# Altium PCB Layout_Dendrometro.PcbDoc (part 1 of 2)
Units mm, origin at the board's own origin, x right, y up, seen from the top; angles counter-clockwise.
Board outline 70 x 70 mm, 4 copper layers (L1 - TOP (Sig), L2 (GND), L3 (GND), L4 - BOT (Sig)), stack 0.603 mm thick; 138 components, 78 nets, 374 pads, 106 vias.
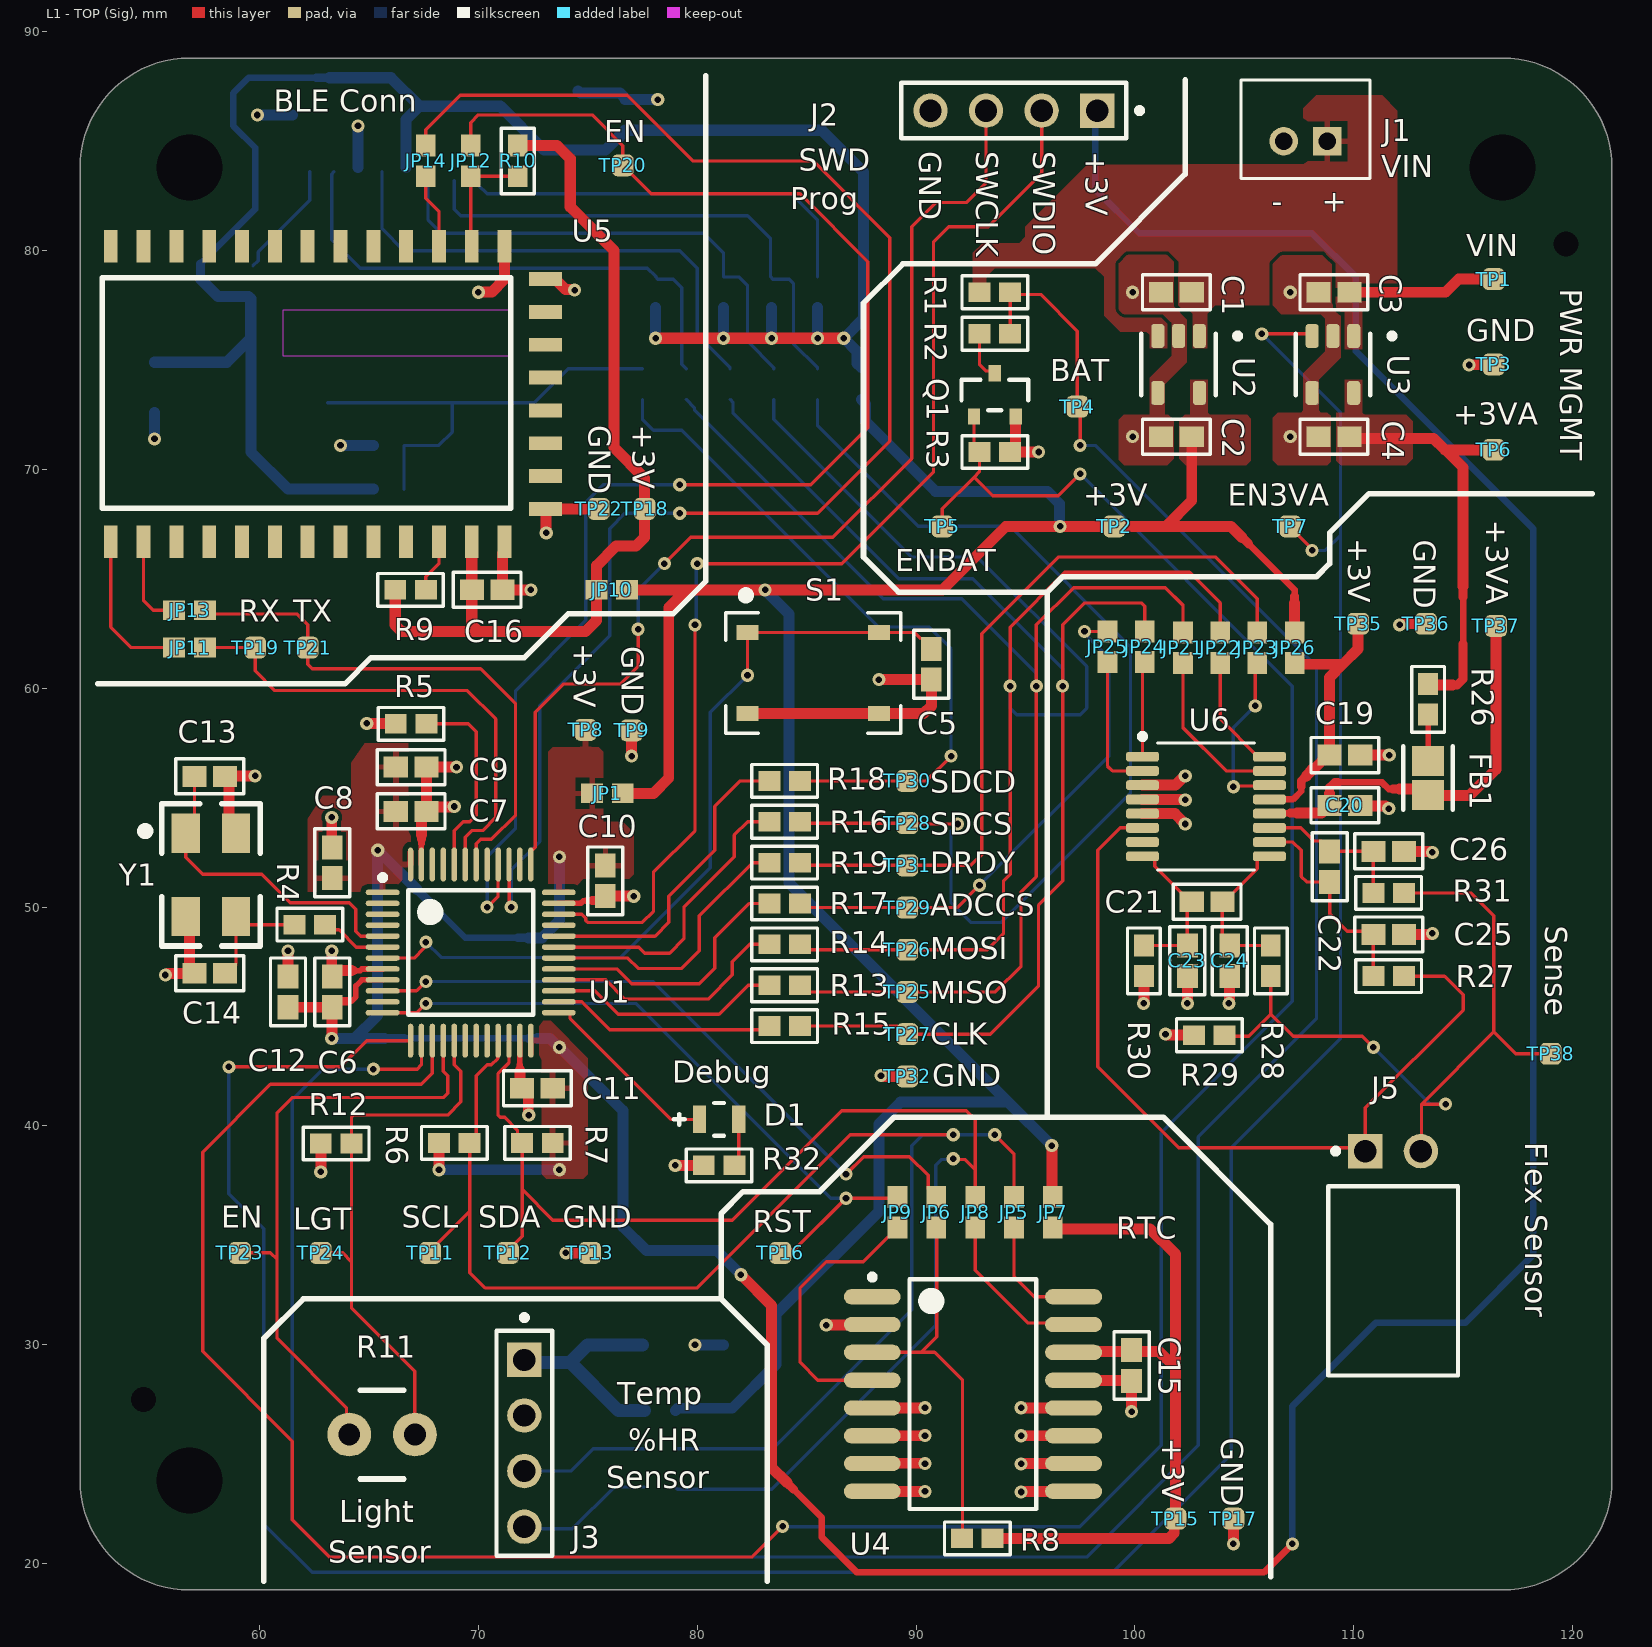
[diagram p0: L1 - TOP (Sig) view]
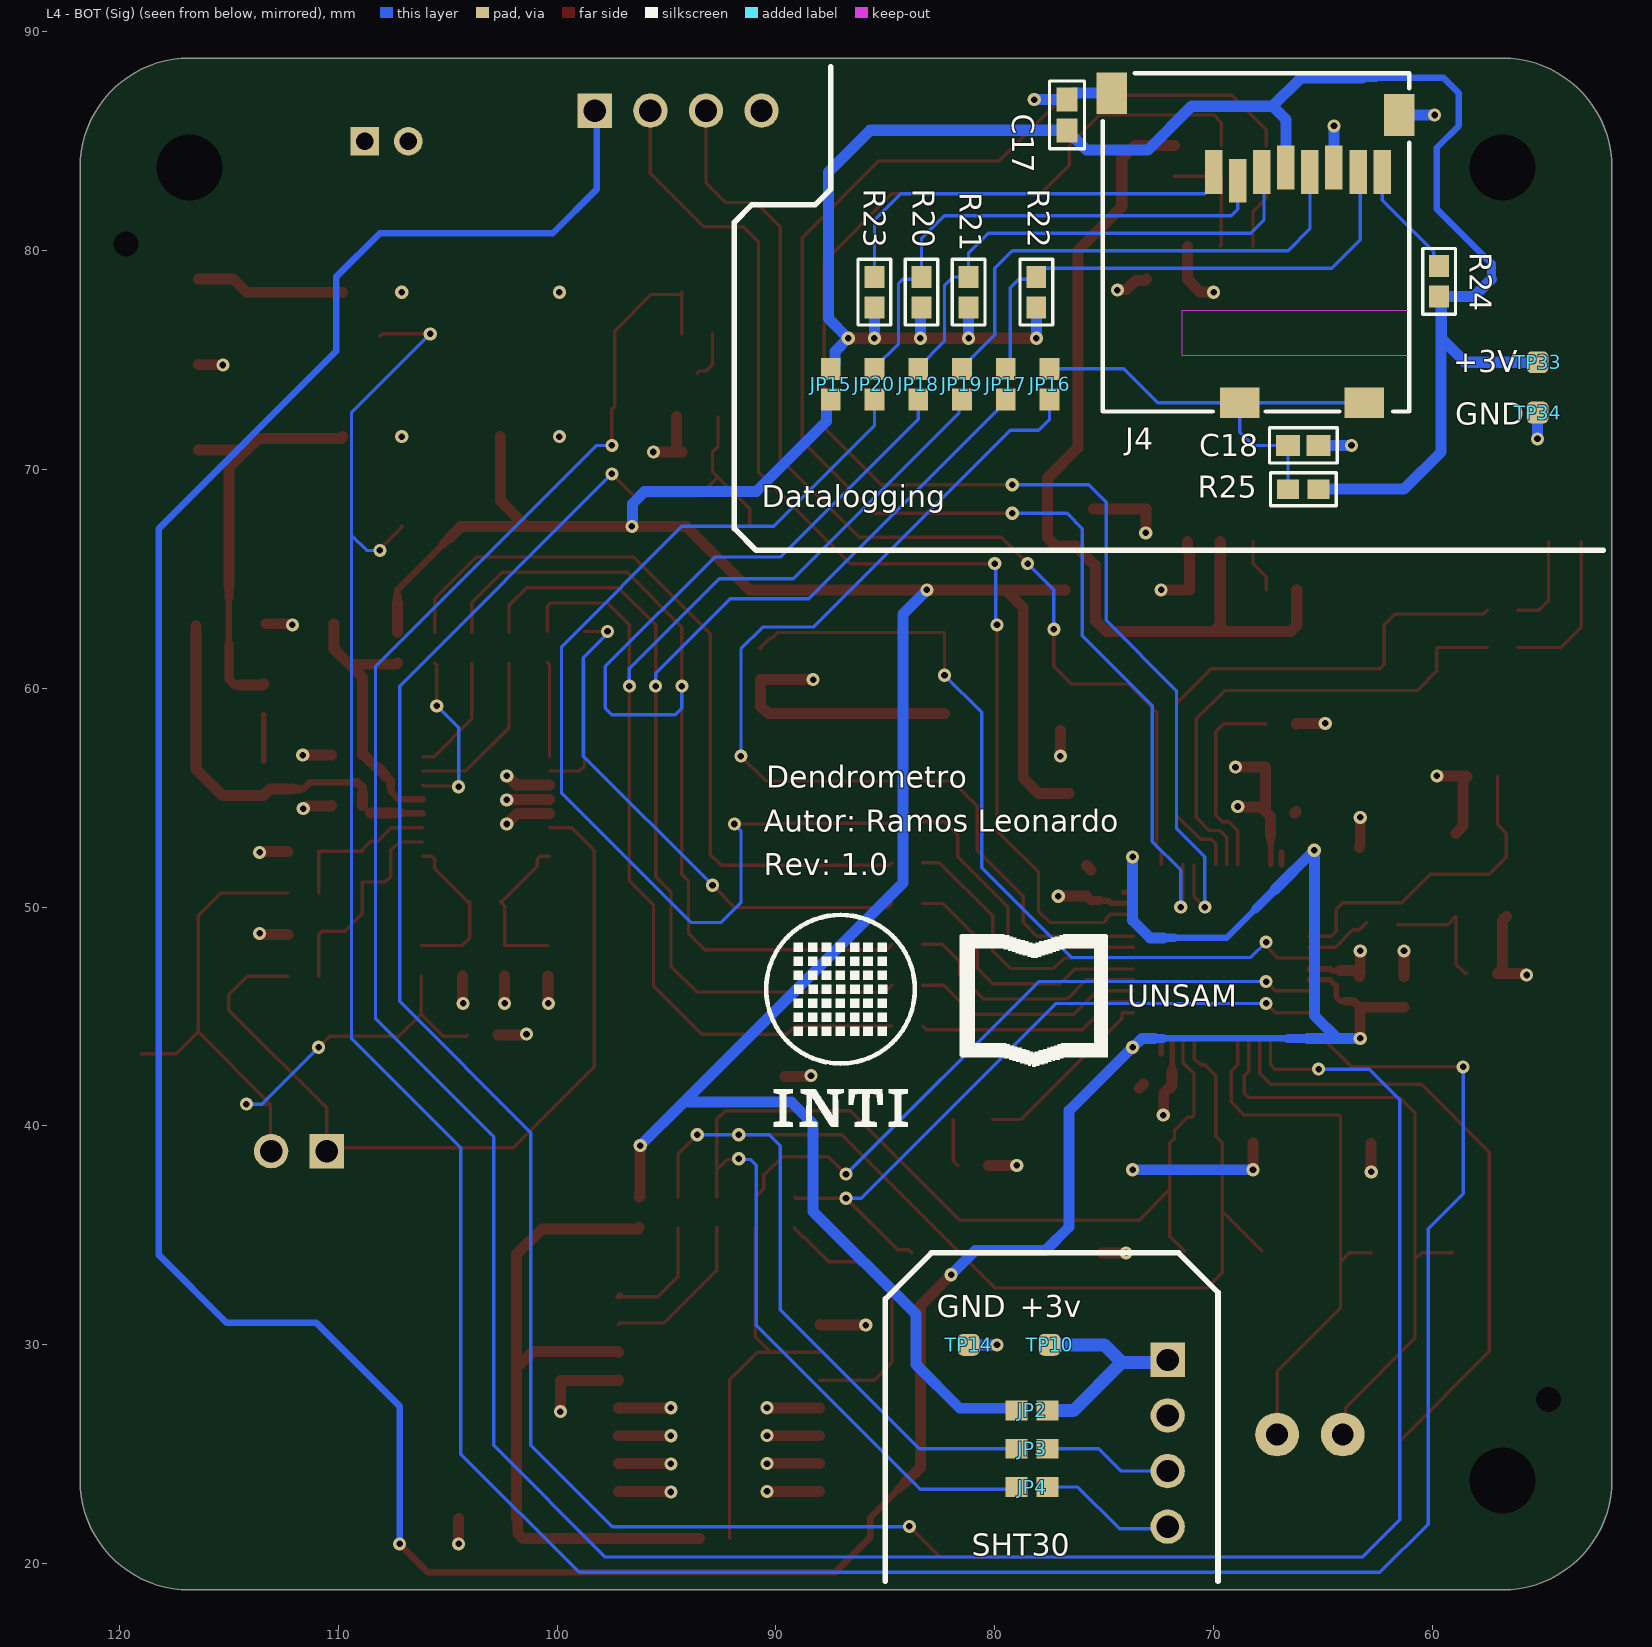
[diagram p1: L4 - BOT (Sig) view, seen from below]
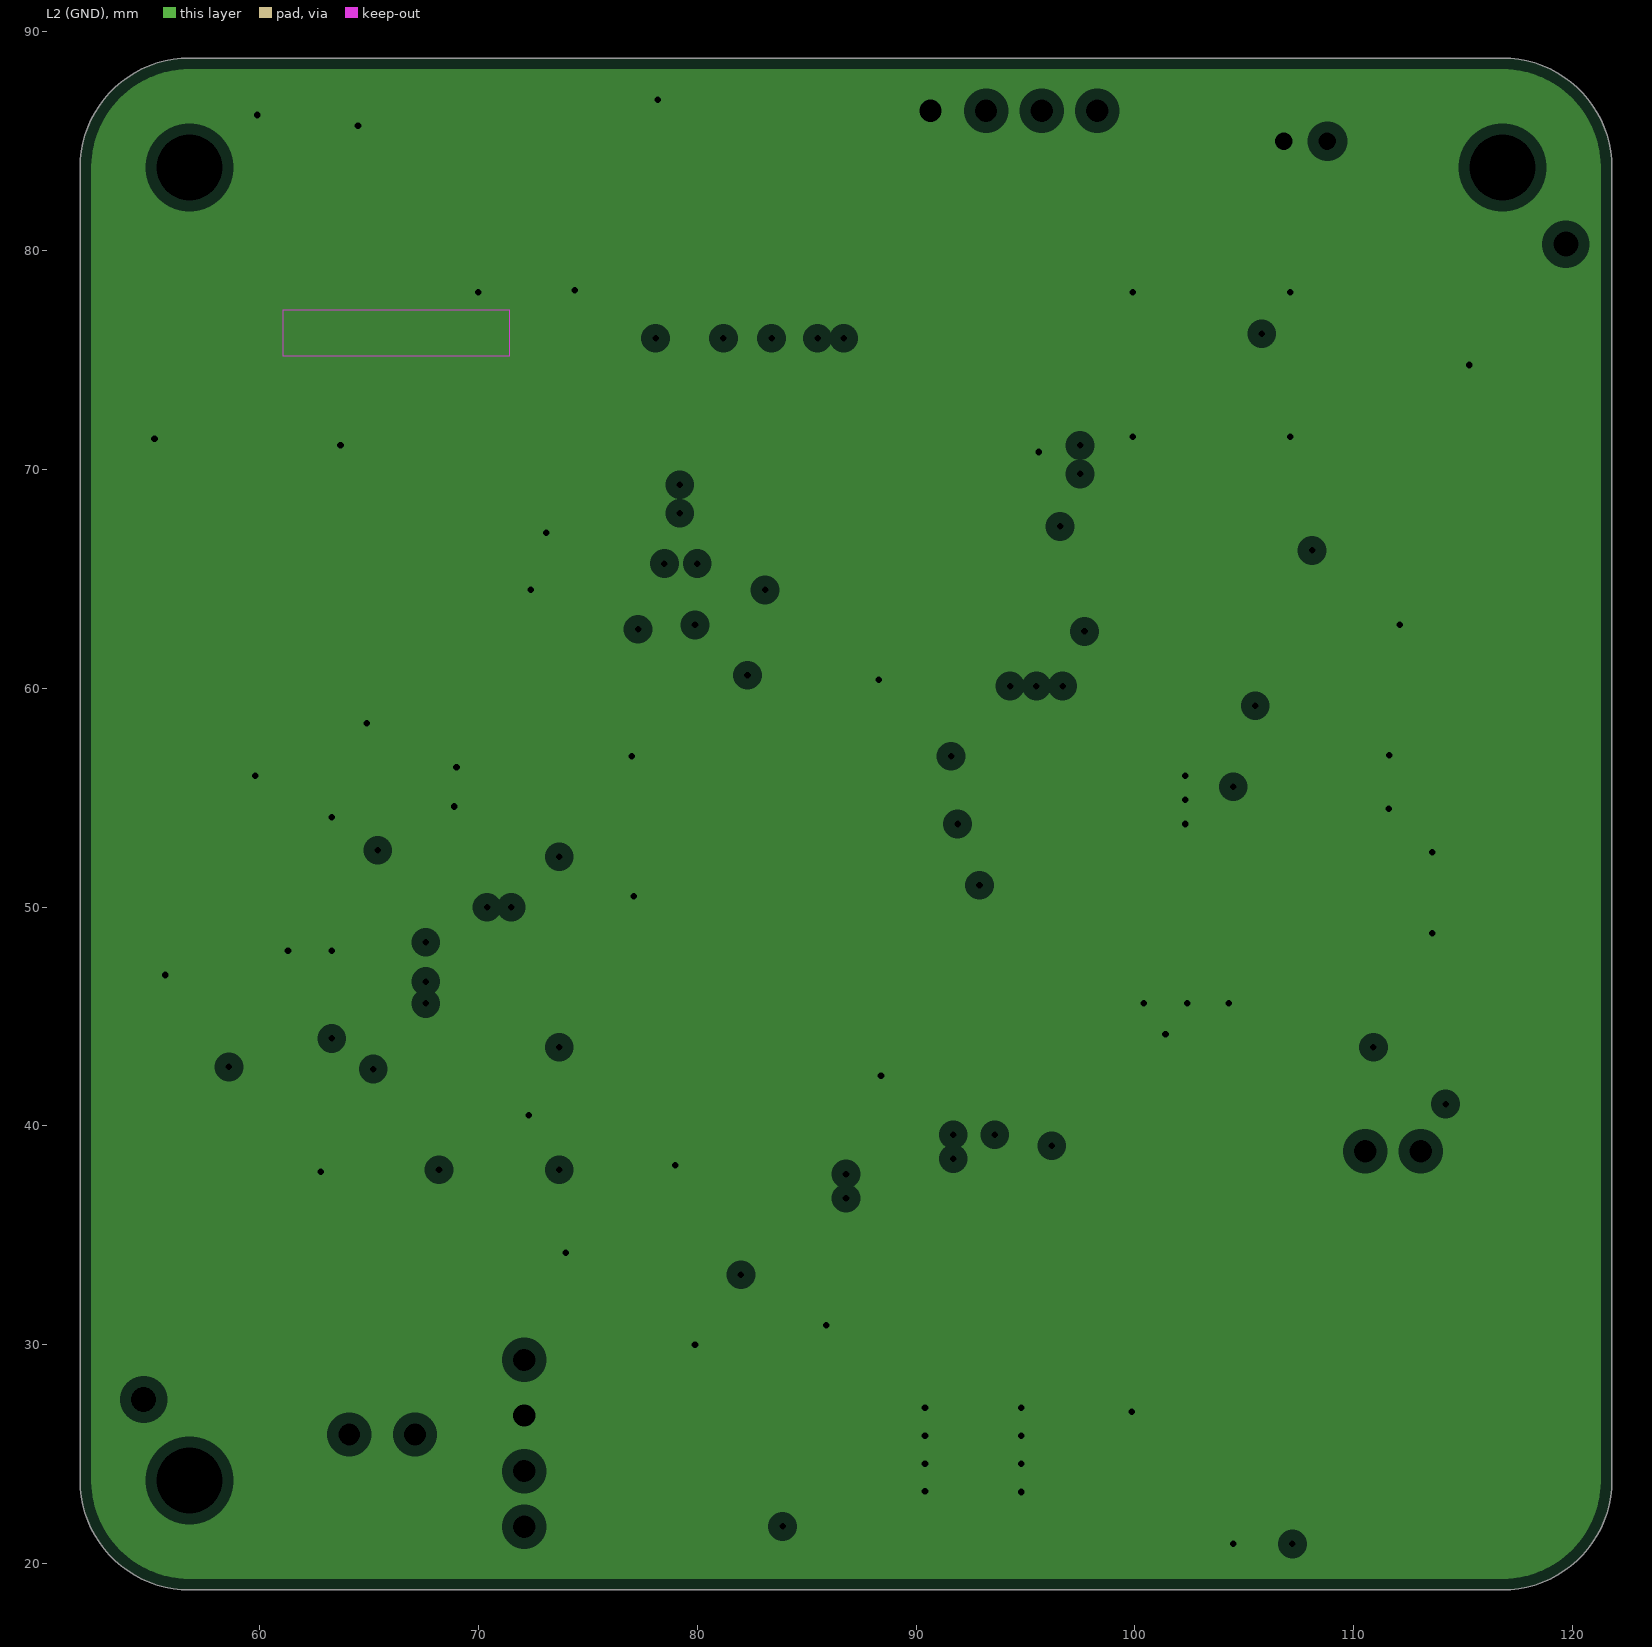
[diagram p2: L2 (GND), clearances drawn from the general rule]
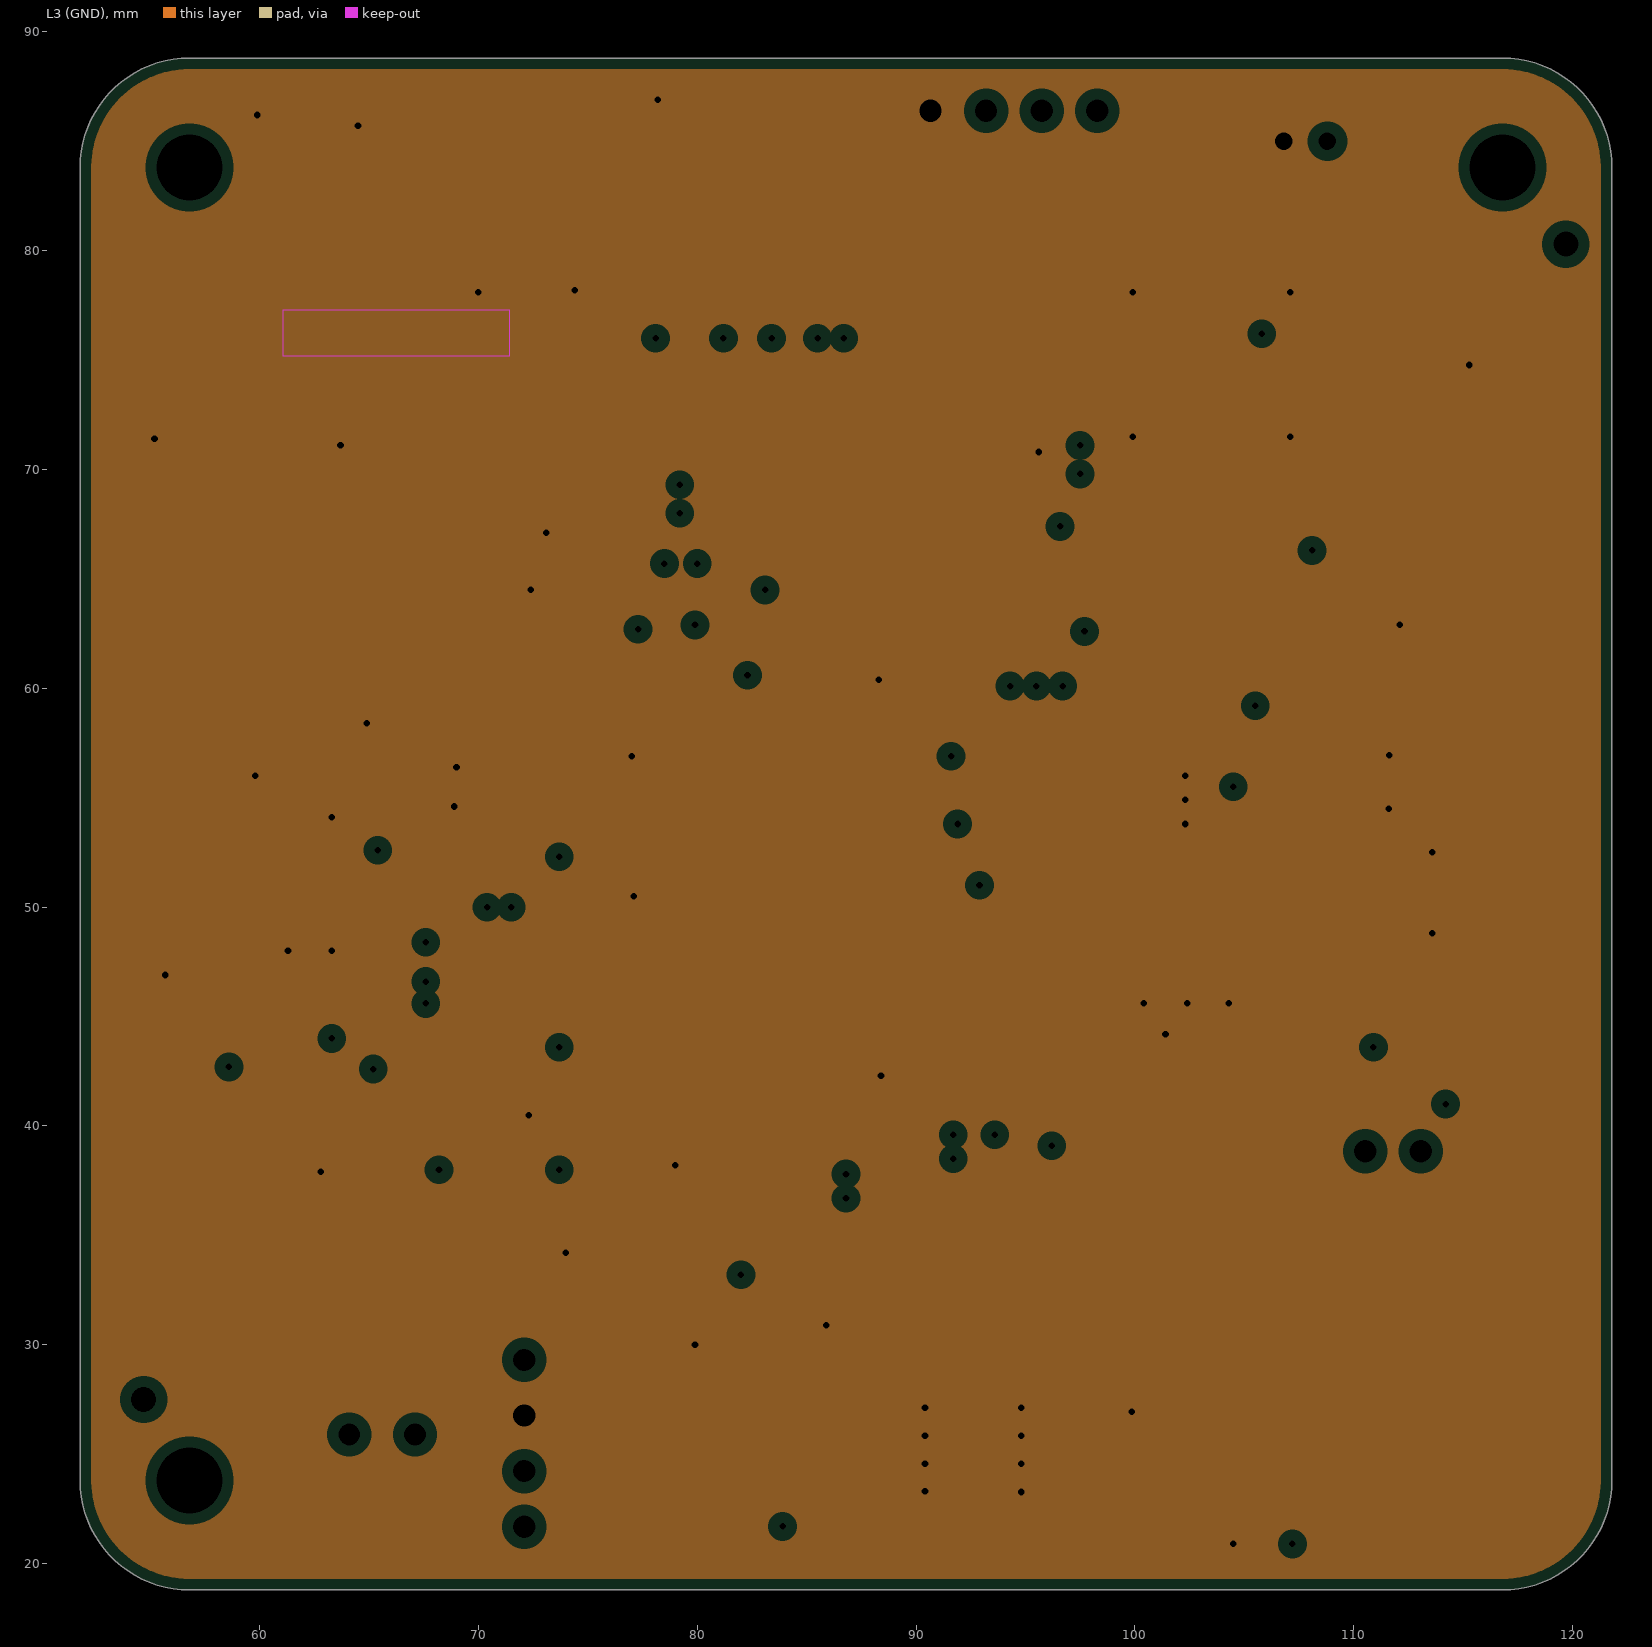
[diagram p3: L3 (GND), clearances drawn from the general rule]
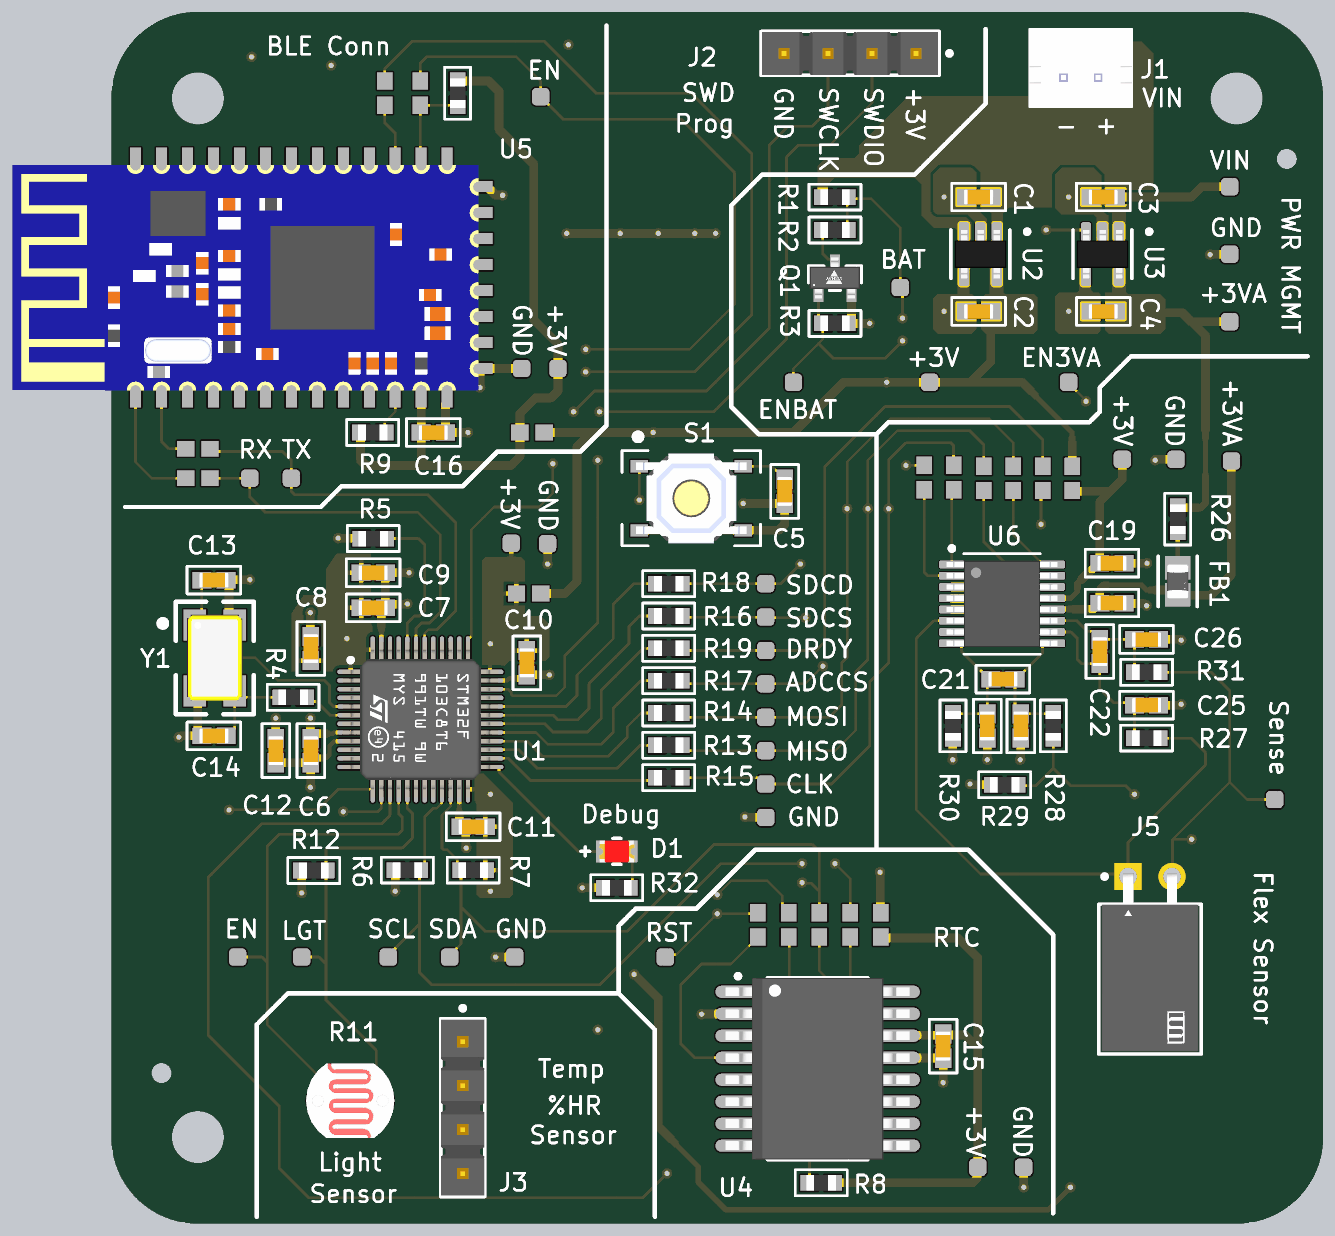
[diagram p5: 3D render of the assembled board from above, using the file's embedded part models]
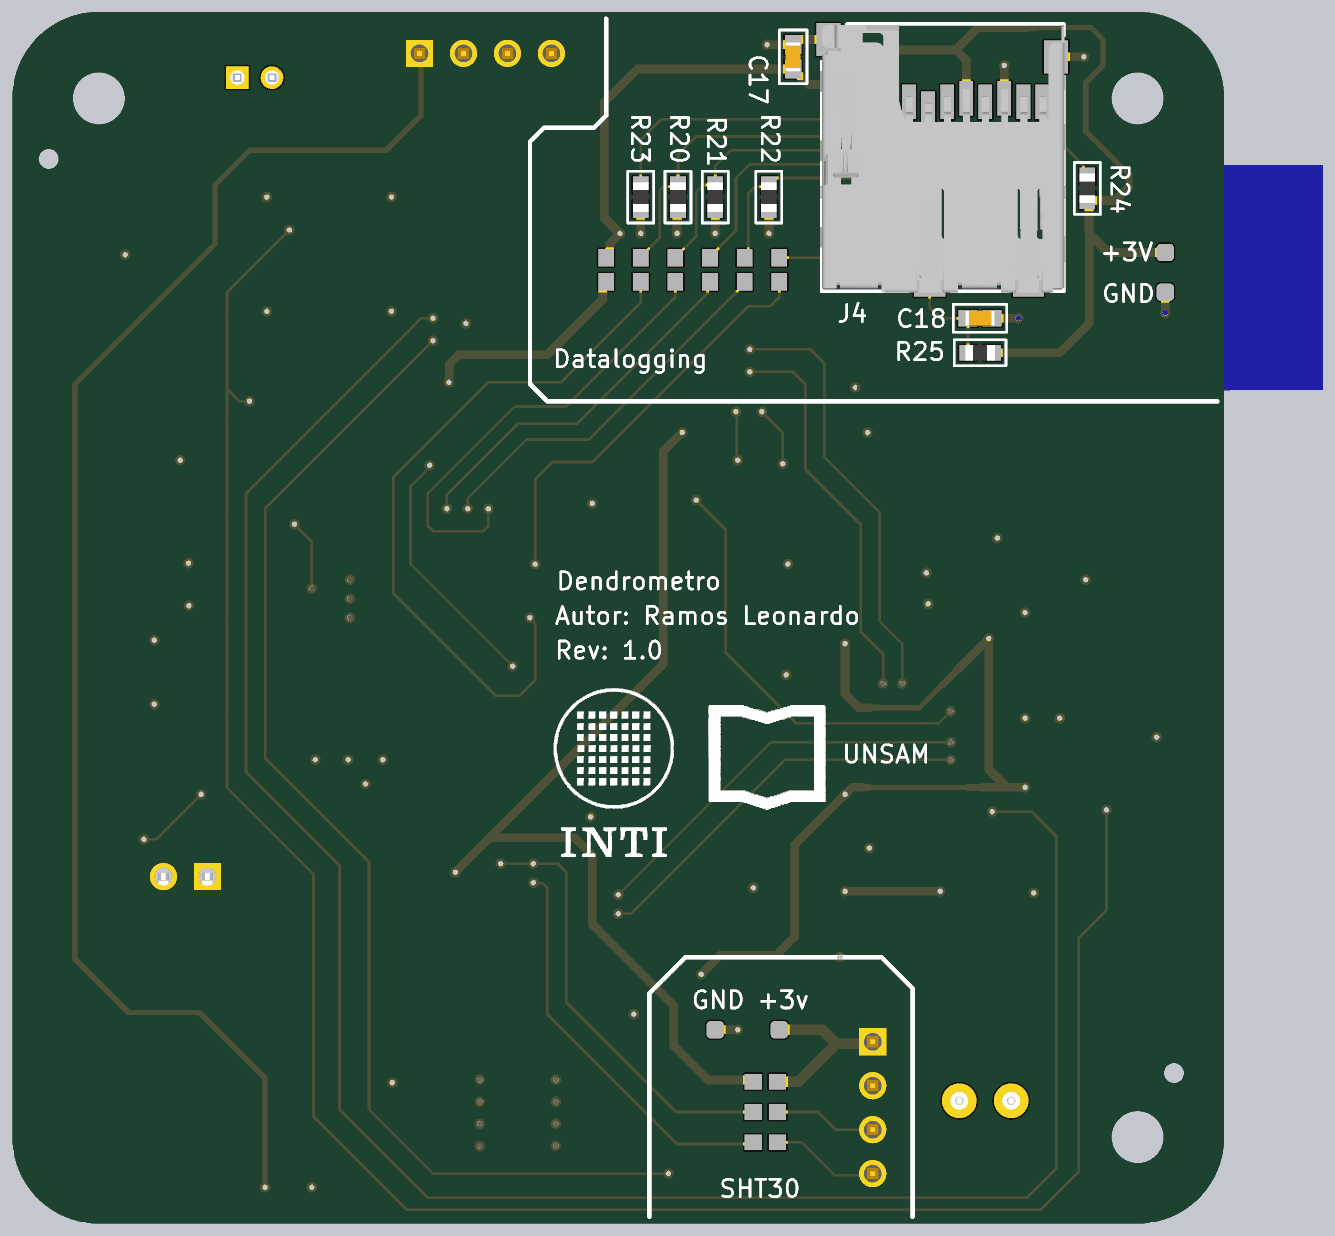
[diagram p6: 3D render of the assembled board from below, using the file's embedded part models]

## Layer stack, top to bottom
Top Solder: solder mask 0.0102, Solder Resist, Dk 3.5
L1 - TOP (Sig): signal copper 0.0356
Dielectric 2: prepreg 0.0711, PP-006, Dk 4.1
L2 (GND): plane copper 0.035, net GND
Dielectric 1: dielectric 0.32, FR-4, Dk 4.8
L3 (GND): plane copper 0.035, net GND
Dielectric 3: prepreg 0.0711, PP-006, Dk 4.1
L4 - BOT (Sig): signal copper 0.0356
Bottom Solder: solder mask 0.0102, Solder Resist, Dk 3.5

## Board outline
51.8,23.8 51.8,83.8 cw(c56.8,83.8) 56.8,88.8 116.8,88.8 cw(c116.8,83.8) 121.8,83.8 121.8,23.8 cw(c116.8,23.8) 116.8,18.8 56.8,18.8 cw(c56.8,23.8)

## Design rules (kind name [scope] priority, off if disabled: settings)
BoardOutlineClearance [All] p1: gap=0.2 ignorepadtopadclearanceinfootprint=FALSE
Clearance [All] p1: gap=0.15 ignorepadtopadclearanceinfootprint=FALSE
HoleSize [All] p1: absolutevalues=TRUE maxlimit=6.3 minlimit=0.25 maxpercent=80.000 minpercent=20.000
HoleToHoleClearance [All] p1: gap=0.2 allowstackedmicrovias=TRUE
MinimumAnnularRing [All] p1: minimumring=0.15
MinimumSolderMaskSliver [All] p1: minsoldermaskwidth=0.1
PlaneClearance [All] p1: clearance=0.508
PlaneConnect [All] p1: planeconnectstyle=Direct reliefexpansion=0.508 reliefentries=4 reliefconductorwidth=0.254 reliefairgap=0.254
PolygonConnect Regulator_Polygon [InNet('VIN') or InNet('GND') or InNet('+3V')or InNet('+3VA')] p1: thpad.connectstyle=Relief thpad.reliefconductorwidth=0.254 thpad.reliefentries=4 thpad.polygonreliefangle="90 Angle" thpad.airgapwidth=0.254 smdpad.connectstyle=Direct smdpad.reliefconductorwidth=0.254 smdpad.reliefentries=4 smdpad.polygonreliefangle="90 Angle" smdpad.airgapwidth=0.254 via.connectstyle=Direct via.reliefconductorwidth=0.254 via.reliefentries=4 via.polygonreliefangle="90 Angle" via.airgapwidth=0.254
PolygonConnect MCU_Power_Polygon [InNet('+3V_MCU')] p2: thpad.connectstyle=Relief thpad.reliefconductorwidth=0.254 thpad.reliefentries=4 thpad.polygonreliefangle="90 Angle" thpad.airgapwidth=0.254 smdpad.connectstyle=Relief smdpad.reliefconductorwidth=0.254 smdpad.reliefentries=4 smdpad.polygonreliefangle="90 Angle" smdpad.airgapwidth=0.254 via.connectstyle=Direct via.reliefconductorwidth=0.254 via.reliefentries=4 via.polygonreliefangle="90 Angle" via.airgapwidth=0.254
PolygonConnect [All] p3: connectstyle=Relief reliefconductorwidth=0.15 reliefentries=4 polygonreliefangle="90 Angle" airgapwidth=0.254
RoutingVias [All] p1: holewidth=0.25 width=0.5 viastyle="Through Hole" minholewidth=0.25 minwidth=0.5 maxholewidth=0.3 maxwidth=0.6
SilkToSolderMaskClearance [IsPad] p1: minsilkscreentomaskgap=0.15 clearancetoexposedcopper=TRUE
SolderMaskExpansion TightSolderMask [InComponent('U6') or InComponent('U1') or InComponent('J4')] p1: expansion=0.05 istentingtop=FALSE
SolderMaskExpansion [All] p2: expansion=0.1 istentingtop=FALSE
SupplyNets "Schematic Supply Nets_11" [InNet('+3V_ADS_A')] p1: voltage=0.000
SupplyNets "Schematic Supply Nets_10" [InNet('+3V_BLE')] p2: voltage=0.000
SupplyNets "Schematic Supply Nets_9" [InNet('+3V_RTC')] p3: voltage=0.000
SupplyNets "Schematic Supply Nets_8" [InNet('+3V_SD')] p4: voltage=0.000
SupplyNets "Schematic Supply Nets_7" [InNet('+3V')] p5: voltage=0.000
SupplyNets "Schematic Supply Nets_6" [InNet('+3VA')] p6: voltage=0.000
SupplyNets "Schematic Supply Nets_5" [InNet('GND')] p7: voltage=0.000
SupplyNets "Schematic Supply Nets_3" [InNet('VIN')] p8: voltage=0.000
SupplyNets "Schematic Supply Nets_2" [InNet('+3V_ADS_D')] p9: voltage=0.000
SupplyNets "Schematic Supply Nets_1" [InNet('+3V_SHT')] p10: voltage=0.000
SupplyNets "Schematic Supply Nets" [InNet('+3V_MCU')] p11: voltage=0.000
Width Power_Traces [InNet('+3V') OR InNet('+3VA') OR InNet('+3V_ADS_A')OR InNet('+3V_ADS_D') OR InNet('+3V_BLE') OR InNet('+3V_MCU') OR InNet('+3V_RTC') OR InNet('+3V_SD') OR InNet('+3V_SHT') OR InNet('VIN') OR InNet('GND')] p1: maxlimit=1.016 minlimit=0.254 preferedwidth=0.508 minimp=50.000000 maximp=50.000000 favimp=50.000000
Width General_Routing [All] p2: maxlimit=0.254 minlimit=0.152 preferedwidth=0.152 minimp=50.000000 maximp=50.000000 favimp=50.000000
Width [All] p3: maxlimit=0.254 minlimit=0.254 preferedwidth=0.254
24 further rules are at their usual default settings.

## Classes and differential pairs
net class UART: HM10_RX HM10_TX RX_MCU TX_MCU
net class SWD: SWCLK SWDIO
net class SPI: ADS_CS ADS_DIN ADS_DOUT ADS_SCLK SD_CLK SD_CMD SD_DAT0 SD_DAT3 SPI_CLK SPI_CLK_MCU SPI_CS_ADC SPI_CS_ADC_MCU SPI_CS_SD SPI_CS_SD_MCU SPI_MISO SPI_MISO_MCU SPI_MOSI SPI_MOSI_MCU
net class I2C: DS_SCL DS_SDA I2C_SCL I2C_SDA SHT_SCL SHT_SDA
component class SPI_Devices: R13 R14 R15 R16 R17 R18 R19 TP25 TP26 TP27 TP28 TP29 TP30 TP31 TP32
component class Power_Management: C1 C2 C3 C4 J1 Q1 R1 R2 R3 TP1 TP2 TP3 TP4 TP5 TP6 TP7 U2 U3
component class MCU_Core: C5 C6 C7 C8 C9 C10 C11 C12 C13 C14 J2 JP1 R4 R5 S1 TP8 TP9 Y1
component class Main: U1
component class Light_Monitoring: R11 R12 TP23 TP24
component class I2C_Devices: C15 J3 JP2 JP3 JP4 JP5 JP6 JP7 JP8 JP9 R6 R7 R8 TP10 TP11 TP12 TP13 TP14 TP15 TP16 TP17 U4
component class Flex_Sensor: C19 JP21 JP22 JP23 JP24 JP25 JP26 TP35 TP36 U6
component class Debugging_Leds: D1 R32
component class Datalogging: C17 C18 J4 JP15 JP16 JP17 JP18 JP19 JP20 R20 R21 R22 R23 R24 R25 TP33 TP34
component class BLE_Connectivity: C16 JP10 JP11 JP12 JP13 JP14 R9 R10 TP18 TP19 TP20 TP21 TP22 U5
component class ADS_AFE: C20 C21 C22 C23 C24 C25 C26 FB1 J5 R26 R27 R28 R29 R30 R31 TP37 TP38

## Components (designator, comment, footprint, x,y, rotation, side; value= is the part's Value field where it differs from the comment)
C1 "Simbolo de capacitor genérico" CAP_0603 101.9,78.1 r180 top
C2 "Simbolo de capacitor genérico" CAP_0603 101.9,71.5 r180 top
C3 "Simbolo de capacitor genérico" CAP_0603 109.1,78.1 r180 top
C4 "Simbolo de capacitor genérico" CAP_0603 109.1,71.5 r180 top
C5 "Simbolo de capacitor genérico" CAP_0603 90.7,61.1 r270 top
C6 "Simbolo de capacitor genérico" CAP_0603 63.325,46.125 r90 top
C7 "Simbolo de capacitor genérico" CAP_0603 66.925,54.375 r0 top
C8 "Simbolo de capacitor genérico" CAP_0603 63.325,52.025 r90 top
C9 "Simbolo de capacitor genérico" CAP_0603 66.925,56.4 r0 top
C10 "Simbolo de capacitor genérico" CAP_0603 75.8,51.2 r270 top
C11 "Simbolo de capacitor genérico" CAP_0603 72.7,41.725 r180 top
C12 "Simbolo de capacitor genérico" CAP_0603 61.3,46.125 r90 top
C13 "Simbolo de capacitor genérico" CAP_0603 57.725,55.975 r0 top
C14 "Simbolo de capacitor genérico" CAP_0603 57.725,46.975 r180 top
C15 "Simbolo de capacitor genérico" CAP_0603 99.85,29.055 r270 top
C16 "Simbolo de capacitor genérico" CAP_0603 70.4,64.5 r0 top
C17 "Simbolo de capacitor genérico" CAP_0603 76.7,86.2 r90 bottom
C18 "Simbolo de capacitor genérico" CAP_0603 65.9,71.1 r180 bottom
C19 "Simbolo de capacitor genérico" CAP_0603 109.6,56.95 r0 top
C20 "Simbolo de capacitor genérico" CAP_0603 109.6,54.65 r0 top
C21 "Simbolo de capacitor genérico" CAP_0603 103.3,50.25 r180 top
C22 "Simbolo de capacitor genérico" CAP_0603 108.9,51.85 r90 top
C23 "Simbolo de capacitor genérico" CAP_0603 102.4,47.55 r270 top
C24 "Simbolo de capacitor genérico" CAP_0603 104.333,47.55 r270 top
C25 "Simbolo de capacitor genérico" CAP_0603 111.6,48.75 r0 top
C26 "Simbolo de capacitor genérico" CAP_0603 111.6,52.55 r0 top
D1 "Red LED" FP-SML-LX0805SRC-TR-MFG 81,40.3 r0 top
FB1 "MPZ2012S102AT000" FP-MPZ2012-IPC_B 113.4,55.9 r270 top
J1 "JST CONN" JST_B2B-PH-K-S 107.8,85.55 r0 top
J2 "HTSW-104-07-G-S" FP-HTSW-104-07-G-S-MFG 94.47,86.4 r180 top
J3 "HTSW-104-07-G-S" FP-HTSW-104-07-G-S-MFG 72.1,25.5 r270 top
J4 "MEM2061-01-188-00-A_revA" MEM2061-01-188-00-A_revA 68.06,80.375 r0 bottom
J5 "PPTC021LGBN-RC" FP-PPTC021LGBN-RC-MFG 111.8,33 r0 top
JP1 "Generic JP" RES_0R_0603 75.9,55.2 r180 top value=0Ω
JP2 "Generic JP" RES_0R_0603 78.3,27 r180 bottom value=0Ω
JP3 "Generic JP" RES_0R_0603 78.3,25.25 r180 bottom value=0Ω
JP4 "Generic JP" RES_0R_0603 78.3,23.5 r180 bottom value=0Ω
JP5 "Generic JP" RES_0R_0603 94.475,36.055 r270 top value=0Ω
JP6 "Generic JP" RES_0R_0603 90.925,36.055 r90 top value=0Ω
JP7 "Generic JP" RES_0R_0603 96.25,36.055 r270 top value=0Ω
JP8 "Generic JP" RES_0R_0603 92.7,36.055 r270 top value=0Ω
JP9 "Generic JP" RES_0R_0603 89.15,36.055 r90 top value=0Ω
JP10 "Generic JP" RES_0R_0603 76.1,64.5 r180 top value=0Ω
JP11 "Generic JP" RES_0R_0603 56.8,61.863 r180 top value=0Ω
JP12 "Generic JP" RES_0R_0603 69.649,84.1 r90 top value=0Ω
JP13 "Generic JP" RES_0R_0603 56.8,63.563 r180 top value=0Ω
JP14 "Generic JP" RES_0R_0603 67.6,84.1 r90 top value=0Ω
JP15 "Generic JP" RES_0R_0603 87.5,73.9 r90 bottom value=0Ω
JP16 "Generic JP" RES_0R_0603 77.5,73.9 r270 bottom value=0Ω
JP17 "Generic JP" RES_0R_0603 79.5,73.9 r90 bottom value=0Ω
JP18 "Generic JP" RES_0R_0603 83.5,73.9 r90 bottom value=0Ω
JP19 "Generic JP" RES_0R_0603 81.5,73.9 r90 bottom value=0Ω
JP20 "Generic JP" RES_0R_0603 85.5,73.9 r90 bottom value=0Ω
JP21 "Generic JP" RES_0R_0603 102.2,61.85 r270 top value=0Ω
JP22 "Generic JP" RES_0R_0603 103.9,61.85 r270 top value=0Ω
JP23 "Generic JP" RES_0R_0603 105.6,61.85 r90 top value=0Ω
JP24 "Generic JP" RES_0R_0603 100.45,61.9 r270 top value=0Ω
JP25 "Generic JP" RES_0R_0603 98.75,61.9 r270 top value=0Ω
JP26 "Generic JP" RES_0R_0603 107.3,61.85 r270 top value=0Ω
Q1 "SI2302CDS-T1-E3" FP-S-03946-MFG 93.6,73.409 r90 top
R1 "Simbolo de resistencia genérica" RES_0603 93.6,78.1 r0 top value=10kΩ
R2 "Simbolo de resistencia genérica" RES_0603 93.6,76.2 r180 top value=22kΩ
R3 "Simbolo de resistencia genérica" RES_0603 93.6,70.8 r0 top value=47kΩ
R4 "Simbolo de resistencia genérica" RES_0603 62.3,49.2 r0 top value=2kΩ
R5 "Simbolo de resistencia genérica" RES_0603 66.925,58.375 r180 top value=10kΩ
R6 "Simbolo de resistencia genérica" RES_0603 68.9,39.225 r0 top value=4k7Ω
R7 "Simbolo de resistencia genérica" RES_0603 72.7,39.225 r180 top value=4k7Ω
R8 "Simbolo de resistencia genérica" RES_0603 92.8,21.155 r180 top value=4k7Ω
R9 "Simbolo de resistencia genérica" RES_0603 66.9,64.5 r0 top value=47kΩ
R10 "Simbolo de resistencia genérica" RES_0603 71.8,84.1 r270 top value=47kΩ
R11 "Simbolo de LDR genérico" "Generic LDR" 65.6,25.9 r0 top
R12 "Simbolo de resistencia genérica" RES_0603 63.5,39.2 r180 top value=100kΩ
R13 "Simbolo de resistencia genérica" RES_0603 84,46.433 r0 top value=47Ω
R14 "Simbolo de resistencia genérica" RES_0603 84,48.3 r0 top value=47Ω
R15 "Simbolo de resistencia genérica" RES_0603 84,44.567 r0 top value=47Ω
R16 "Simbolo de resistencia genérica" RES_0603 84,53.9 r0 top value=47Ω
R17 "Simbolo de resistencia genérica" RES_0603 84,50.167 r0 top value=47Ω
R18 "Simbolo de resistencia genérica" RES_0603 84,55.767 r0 top value=47Ω
R19 "Simbolo de resistencia genérica" RES_0603 84,52.033 r0 top value=47Ω
R20 "Simbolo de resistencia genérica" RES_0603 83.35,78.1 r90 bottom value=47kΩ
R21 "Simbolo de resistencia genérica" RES_0603 81.2,78.1 r90 bottom value=47kΩ
R22 "Simbolo de resistencia genérica" RES_0603 78.1,78.1 r90 bottom value=47kΩ
R23 "Simbolo de resistencia genérica" RES_0603 85.5,78.1 r90 bottom value=47kΩ
R24 "Simbolo de resistencia genérica" RES_0603 59.7,78.6 r90 bottom value=47kΩ
R25 "Simbolo de resistencia genérica" RES_0603 65.9,69.1 r0 bottom value=47kΩ
R26 "Simbolo de resistencia genérica" RES_0603 113.4,59.5 r270 top value=220mΩ
R27 "Simbolo de resistencia genérica" RES_0603 111.6,46.85 r180 top value=15kΩ
R28 "Simbolo de resistencia genérica" RES_0603 106.217,47.55 r270 top value=8k2Ω
R29 "Simbolo de resistencia genérica" RES_0603 103.4,44.15 r180 top value=15kΩ
R30 "Simbolo de resistencia genérica" RES_0603 100.417,47.55 r270 top value=8k2Ω
R31 "Simbolo de resistencia genérica" RES_0603 111.6,50.65 r180 top value=15kΩ
R32 "Simbolo de resistencia genérica" RES_0603 81,38.2 r180 top value=82Ω
S1 "Tactile push button 5,2mm x 5,2mm" "Switch Tactile 5,2mm x 5,2mm" 85.3,60.7 r0 top
TP1 "Testpoint SMD" Testpoint_SMD 116.4,78.7 r0 top
TP2 "Testpoint SMD" Testpoint_SMD 99.067,67.4 r270 top
TP3 "Testpoint SMD" Testpoint_SMD 116.4,74.8 r0 top
TP4 "Testpoint SMD" Testpoint_SMD 97.375,72.875 r270 top
TP5 "Testpoint SMD" Testpoint_SMD 91.2,67.4 r270 top
TP6 "Testpoint SMD" Testpoint_SMD 116.4,70.9 r0 top
TP7 "Testpoint SMD" Testpoint_SMD 107.1,67.4 r270 top
TP8 "Testpoint SMD" Testpoint_SMD 74.9,58.1 r0 top
TP9 "Testpoint SMD" Testpoint_SMD 77,58.075 r0 top
TP10 "Testpoint SMD" Testpoint_SMD 77.5,30 r90 bottom
TP11 "Testpoint SMD" Testpoint_SMD 67.8,34.2 r90 top
TP12 "Testpoint SMD" Testpoint_SMD 71.35,34.2 r90 top
TP13 "Testpoint SMD" Testpoint_SMD 75.1,34.2 r90 top
TP14 "Testpoint SMD" Testpoint_SMD 81.2,30 r90 bottom
TP15 "Testpoint SMD" Testpoint_SMD 101.85,22.055 r270 top
TP16 "Testpoint SMD" Testpoint_SMD 83.8,34.2 r270 top
TP17 "Testpoint SMD" Testpoint_SMD 104.5,22.055 r270 top
TP18 "Testpoint SMD" Testpoint_SMD 77.6,68.2 r90 top
TP19 "Testpoint SMD" Testpoint_SMD 59.8,61.863 r90 top
TP20 "Testpoint SMD" Testpoint_SMD 76.6,83.9 r90 top
TP21 "Testpoint SMD" Testpoint_SMD 62.2,61.863 r90 top
TP22 "Testpoint SMD" Testpoint_SMD 75.5,68.2 r90 top
TP23 "Testpoint SMD" Testpoint_SMD 59.1,34.2 r90 top
TP24 "Testpoint SMD" Testpoint_SMD 62.8,34.2 r90 top
TP25 "Testpoint SMD" Testpoint_SMD 89.6,46.124 r90 top
TP26 "Testpoint SMD" Testpoint_SMD 89.6,48.052 r90 top
TP27 "Testpoint SMD" Testpoint_SMD 89.6,44.195 r90 top
TP28 "Testpoint SMD" Testpoint_SMD 89.6,53.838 r90 top
TP29 "Testpoint SMD" Testpoint_SMD 89.6,49.981 r90 top
TP30 "Testpoint SMD" Testpoint_SMD 89.6,55.767 r90 top
TP31 "Testpoint SMD" Testpoint_SMD 89.6,51.91 r90 top
TP32 "Testpoint SMD" Testpoint_SMD 89.6,42.267 r90 top
TP33 "Testpoint SMD" Testpoint_SMD 55.2,74.9 r0 bottom
TP34 "Testpoint SMD" Testpoint_SMD 55.2,72.6 r0 bottom
TP35 "Testpoint SMD" Testpoint_SMD 110.2,62.95 r90 top
TP36 "Testpoint SMD" Testpoint_SMD 113.3,62.95 r90 top
TP37 "Testpoint SMD" Testpoint_SMD 116.5,62.85 r90 top
TP38 "Testpoint SMD" Testpoint_SMD 119,43.3 r90 top
U1 "STM32F103C8T6" STM-LQFP48_L 69.65,47.925 r0 top
U2 "TPS7A2030PDBVR" SOT-23 102,74.8 r270 top
U3 "TPS7A2030PDBVR" SOT-23 109.05,74.8 r270 top
U4 "DS3231S#" SOIC_16_M 92.6,27.75 r0 top
U5 "HM10 BLE Module" HM10_FOOTPRINT 53.2,74.2 r90 top
U6 "ADS1220" TSSOP-16 103.25,54.6 r0 top
Y1 "Crystal SMD 4-P" SMD5032-4P 57.775,51.475 r270 top

## Footprints (in the part's own frame and the unit in brackets; to place one, negate y for a bottom-side part, rotate by r counter-clockwise, add the part's x,y. Pads: shape width x height; smd on the part's side, far side on the other; paste and mask are expansions set on the pad)
CAP_0603 [mm] "Chip Capacitor, 2-Leads, Body 1,60x0,80mm, IPC Medium Density"
  rect 1.1x0.95 smd: 1(-0.7,0) 2(0.7,0)
  silkscreen extent -1.55,-0.8 1.55,0.8, body extent -0.85,-0.44 0.85,0.44, height 0.87
FP-HTSW-104-07-G-S-MFG [mm]
  rect 1.57x1.57 hole 1.02 paste-2539.97 mask+0: 1(-3.81,0)
  round 1.57 hole 1.02 paste-2539.97 mask+0: 2(-1.27,0) 3(1.27,0) 4(3.81,0)
  silkscreen extent -5.87,-1.27 5.14,1.27, body extent -5.24,-1.37 5.24,1.37, height 0.25
FP-MPZ2012-IPC_B [mm]
  rect 1.354x1.456 smd paste+0 mask+0: 1(-0.776,0) 2(0.776,0)
  silkscreen extent -1.45,-1.13 1.45,1.13, body extent -1.7,-0.98 1.7,0.98, height 0.25
FP-PPTC021LGBN-RC-MFG [mm]
  rect 1.57x1.57 hole 1.02 paste-2539.97 mask+0: 1(-1.27,5.85)
  round 1.57 hole 1.02 paste-2539.97 mask+0: 2(1.27,5.85)
  silkscreen extent -2.97,-4.4 2.97,5.97, body extent -3.07,-4.5 3.07,6.74, height 0.25
FP-S-03946-MFG [mil]
  rect 29x22 smd paste+0 mask+0: 1(-39,37.5) 2(-39,-37.5) 3(39,0)
  silkscreen extent -28,-60 28,60, body extent -57,-64 57,64, height 10
FP-SML-LX0805SRC-TR-MFG [mm]
  rect 0.6x1.25 smd paste+0 mask+0: 1(-0.9,0) 2(0.9,0)
  silkscreen extent -2.07,-0.75 0.22,0.75, body extent -1.3,-0.85 1.3,0.85, height 0.25
"Generic LDR" [mm] "Footprint de un LDR genérico THT."
  round 2 hole 1: 1(-1.5,0) 2(1.5,0)
  silkscreen extent -1,-2.03 1,2.03, body extent -2.55,-2.15 2.55,2.15, height 3.1
HM10_FOOTPRINT [mm] "26.9X13X2.2_BOARD"
  rect 1.5x0.635 smd: 1(-7.5,0) 2(-7.5,-1.5) 3(-7.5,-3) 4(-7.5,-4.5) 5(-7.5,-6) 6(-7.5,-7.5) 7(-7.5,-9) 8(-7.5,-10.5) 9(-7.5,-12) 10(-7.5,-13.5) 11(-7.5,-15) 12(-7.5,-16.5) 13(-7.5,-18) 22(6,-18) 23(6,-16.5) 24(6,-15) 25(6,-13.5) 26(6,-12) 27(6,-10.5) 28(6,-9) 29(6,-7.5) 30(6,-6) 31(6,-4.5) 32(6,-3) 33(6,-1.5) 34(6,0)
  rect 0.635x1.5 smd: 14(-6,-19.875) 15(-4.5,-19.875) 16(-3,-19.875) 17(-1.5,-19.875) 18(0,-19.875) 19(1.5,-19.875) 20(3,-19.875) 21(4.5,-19.875)
  silkscreen extent -5.97,-18.29 4.57,0.38, body extent -7.26,-19.8 5.74,7.1, height 2.2
JST_B2B-PH-K-S [mm]
  rect 1.308x1.308 / inner round 1.308 / far side rect 1.308x1.308 hole 0.8: 1(1,-0.55)
  round 1.308 hole 0.8: 2(-1,-0.55)
  silkscreen extent -2.95,-2.25 2.95,2.25, body extent -2.95,-2.25 2.95,2.25, height 6
MEM2061-01-188-00-A_revA [mm] "Micro SD Memory Card Connector, 1.88mm Profile SMT,Push Push, with normally closed switch"
  rect 0.8x2 smd: 1(1.94,-3.225) 2(0.84,-2.825) 3(-0.26,-3.225) 4(-1.36,-3.425) 5(-2.46,-3.225) 6(-3.56,-3.425) 7(-4.66,-3.225) 8(-5.76,-3.225)
  rect 1.8x1.4 smd: 9(-4.95,7.325) 10(0.75,7.325)
  rect 1.4x1.9 smd: 11(-6.55,-5.825) 12(6.6,-6.825)
  Keep-Out Layer region: -7,5.175 3.37,5.175 3.37,3.095 -7,3.095
  silkscreen extent -7,-7.72 7,7.73, body extent -7.13,-7.65 7.07,7.8, height 1.95
RES_0R_0603 [mm] "0 Ohm resistor placeholder"
  rect 1x0.9 smd: 1(-0.7,0) 2(0.7,0)
RES_0603 [mm] "Chip Resistor, 2-Leads, Body 1,60x0,80mm, IPC Medium Density"
  rect 1x0.9 smd: 1(-0.7,0) 2(0.7,0)
  silkscreen extent -1.5,-0.75 1.5,0.75, body extent -0.85,-0.45 0.85,0.45, height 0.55
SMD5032-4P [mm] "5.0 x 3.2mm SMD"
  rect 1.8x1.3 smd: 1(-1.9,-1.15) 2(1.9,-1.15) 3(1.9,1.15) 4(-1.9,1.15)
  silkscreen extent -3.25,-3.12 3.25,2.25, body extent -2.5,-1.6 2.44,1.6, height 0.86
SOIC_16_M [mm] "SOIC, 16-Leads, Body 10.3x7.5mm, Pitch 1.27mm, IPC Low Density"
  oval 2.6x0.7 smd: 1(-4.6,4.445) 2(-4.6,3.175) 3(-4.6,1.905) 4(-4.6,0.635) 5(-4.6,-0.635) 6(-4.6,-1.905) 7(-4.6,-3.175) 8(-4.6,-4.445) 9(4.6,-4.445) 10(4.6,-3.175) 11(4.6,-1.905) 12(4.6,-0.635) 13(4.6,0.635) 14(4.6,1.905) 15(4.6,3.175) 16(4.6,4.445)
  silkscreen extent -4.72,-5.25 2.9,5.47, body extent -5.32,-5.25 5.32,5.25, height 2.65
SOT-23 [mm]
  rrect50% 1.1x0.6 smd mask+0.07: 1(-1.3,0.95) 2(-1.3,0) 3(-1.3,-0.95) 4(1.3,-0.95) 5(1.3,0.95)
  silkscreen extent -1.42,-1.7 1.4,2.83, body extent -1.4,-1.49 1.4,1.5, height 1.18
STM-LQFP48_L [mm] "QFP, 48-Leads, Body 7x7mm, Pitch 0.5mm, IPC High Density"
  oval 1.55x0.25 smd: 1(-4.025,2.75) 2(-4.025,2.25) 3(-4.025,1.75) 4(-4.025,1.25) 5(-4.025,0.75) 6(-4.025,0.25) 7(-4.025,-0.25) 8(-4.025,-0.75) 9(-4.025,-1.25) 10(-4.025,-1.75) 11(-4.025,-2.25) 12(-4.025,-2.75) 25(4.025,-2.75) 26(4.025,-2.25) 27(4.025,-1.75) 28(4.025,-1.25) 29(4.025,-0.75) 30(4.025,-0.25) 31(4.025,0.25) 32(4.025,0.75) 33(4.025,1.25) 34(4.025,1.75) 35(4.025,2.25) 36(4.025,2.75)
  oval 0.25x1.55 smd: 13(-2.75,-4.025) 14(-2.25,-4.025) 15(-1.75,-4.025) 16(-1.25,-4.025) 17(-0.75,-4.025) 18(-0.25,-4.025) 19(0.25,-4.025) 20(0.75,-4.025) 21(1.25,-4.025) 22(1.75,-4.025) 23(2.25,-4.025) 24(2.75,-4.025) 37(2.75,4.025) 38(2.25,4.025) 39(1.75,4.025) 40(1.25,4.025) 41(0.75,4.025) 42(0.25,4.025) 43(-0.25,4.025) 44(-0.75,4.025) 45(-1.25,4.025) 46(-1.75,4.025) 47(-2.25,4.025) 48(-2.75,4.025)
  silkscreen extent -4.15,-2.85 2.85,3.55, body extent -4.5,-4.5 4.5,4.5, height 1.53
"Switch Tactile 5,2mm x 5,2mm" [mm] "Switch Tactile SPST-NO 5,2mm x 5,2mm"
  rect 1x0.7 smd: 1(-3,1.85) 2(3,1.85) 3(-3,-1.85) 4(3,-1.85)
  silkscreen extent -4,-2.75 4,3.67, body extent -3.2,-2.6 3.2,2.6, height 1.7
Testpoint_SMD [mm] "Testpoint SMD de 1mm de diametro."
  rrect50% 1x1 smd: 1(0,0)
TSSOP-16 [mm]
  rrect50% 1.5x0.45 smd mask+0.05: 1(-2.9,2.275) 2(-2.9,1.625) 3(-2.9,0.975) 4(-2.9,0.325) 5(-2.9,-0.325) 6(-2.9,-0.975) 7(-2.9,-1.625) 8(-2.9,-2.275) 9(2.9,-2.275) 10(2.9,-1.625) 11(2.9,-0.975) 12(2.9,-0.325) 13(2.9,0.325) 14(2.9,0.975) 15(2.9,1.625) 16(2.9,2.275)
  silkscreen extent -3.03,-2.9 2.2,3.33, body extent -3.2,-2.5 3.2,2.5, height 1.1

## Part data
C1 C2 C3 C4 C6 C7 C15 C16 C17 C19 C20: library part "Generic C", Capacitance=10uF, Case Code (Imperial)=0805, Case Code (Metric)=2012, Dielectric=X5R, Max Operating Temperature=85°C, Min Operating Temperature=-55°C, Package Quantity=1, Tolerance=10%, Voltage Rating=10V, Case/Package=0805, Contact Plating=Tin, Depth=1.25mm, Height=1.25mm, Lead Free="Lead Free", Length=2mm, Mount="Surface Mount", Packaging="Tape and Reel", Radiation Hardening=No, Thickness=0.053inch, Voltage Rating (DC)=10V, Width=0.049inch
C5 C8 C9 C10 C11 C12 C18: library part "Generic C", Capacitance=0,1uF, Case Code (Imperial)=0805, Case Code (Metric)=2012, Dielectric=X5R, Max Operating Temperature=85°C, Min Operating Temperature=-55°C, Package Quantity=1, Tolerance=10%, Voltage Rating=10V, Case/Package=0805, Contact Plating=Tin, Depth=1.25mm, Height=1.25mm, Lead Free="Lead Free", Length=2mm, Mount="Surface Mount", Packaging="Tape and Reel", Radiation Hardening=No, Thickness=0.053inch, Voltage Rating (DC)=10V, Width=0.049inch
C13 C14: library part "Generic C", Capacitance=10pF, Case Code (Imperial)=0805, Case Code (Metric)=2012, Dielectric=X5R, Max Operating Temperature=85°C, Min Operating Temperature=-55°C, Package Quantity=1, Tolerance=10%, Voltage Rating=10V, Case/Package=0805, Contact Plating=Tin, Depth=1.25mm, Height=1.25mm, Lead Free="Lead Free", Length=2mm, Mount="Surface Mount", Packaging="Tape and Reel", Radiation Hardening=No, Thickness=0.053inch, Voltage Rating (DC)=10V, Width=0.049inch
C21 C22: library part "Generic C", Capacitance=470nF, Case Code (Imperial)=0805, Case Code (Metric)=2012, Dielectric=X5R, Max Operating Temperature=85°C, Min Operating Temperature=-55°C, Package Quantity=1, Tolerance=10%, Voltage Rating=10V, Case/Package=0805, Contact Plating=Tin, Depth=1.25mm, Height=1.25mm, Lead Free="Lead Free", Length=2mm, Mount="Surface Mount", Packaging="Tape and Reel", Radiation Hardening=No, Thickness=0.053inch, Voltage Rating (DC)=10V, Width=0.049inch
C23 C24 C25 C26: library part "Generic C", Capacitance=47nF, Case Code (Imperial)=0805, Case Code (Metric)=2012, Dielectric=X5R, Max Operating Temperature=85°C, Min Operating Temperature=-55°C, Package Quantity=1, Tolerance=10%, Voltage Rating=10V, Case/Package=0805, Contact Plating=Tin, Depth=1.25mm, Height=1.25mm, Lead Free="Lead Free", Length=2mm, Mount="Surface Mount", Packaging="Tape and Reel", Radiation Hardening=No, Thickness=0.053inch, Voltage Rating (DC)=10V, Width=0.049inch
D1: library part CMP-57192-000013-1, "LED RED CLEAR SMD SML-LX0805SRC-TR", Case Code (Imperial)=0805, Case Code (Metric)=2012, Color=Red, Current Rating=25mA, Forward Current=20mA, Forward Voltage=1.7V, Lens Color=Colorless, Max Operating Temperature=85°C, Min Operating Temperature=-40°C, Package Quantity=3000, Power Rating=100mW, Approvals=UL, Case/Package=0805, Dominant Wavelength=660nm, Height=1.2mm, Illumination Color=Red, Lead Free="Lead Free", Length=2mm, Lens Style=Clear, Lens Transparency=Clear, Luminous Intensity=25mcd, Mount="Surface Mount", Number of LEDs=1, Number of Pins=2, Packaging="Tape and Reel", RoHS Compliant=Yes, Series=-, Test Current=20mA, Viewing Angle=140°, Voltage Rating=1.7V, Voltage Rating (DC)=1.7V, Wavelength=660nm, Width=1.25mm
FB1: library part CMP-08257-000042-1, "FERRITE BEAD 1 KOHM 0805 1LN", Case Code (Imperial)=0805, Case Code (Metric)=2012, Current Rating=1.5A, DC Resistance (DCR)=150mR, Max Operating Temperature=125°C, Min Operating Temperature=-55°C, Package Quantity=4000, Test Frequency=100MHz, Tolerance=25%, Case/Package=0805, Core Material=Ferrite, Depth=1.25mm, Height=0.85mm, Impedance=1kΩ, Length=0.079inch, Max DC Current=1.5A, Mount="Surface Mount", Packaging="Tape and Reel", REACH SVHC="No SVHC", RoHS Compliant=Yes, Termination=SMD/SMT, Weight=0.000194oz, Width=1.25mm
J1: library part B2B-PH-K-S, "CONN JST HEADER VERT 2POS 2MM for LIPO batteries."
J2: library part CMP-02766-001776-1, "CONN HEADER VERT 4POS 2.54MM", Contact Material=Bronze, Contact Plating=Gold, Gender=Male, Mount="Through Hole", Number of Contacts=4, Number of Rows=1, Packaging=Bulk, Pitch=2.54mm, Radiation Hardening=No, Reach SVHC Compliant=Yes, RoHS Compliant=Yes, Series=HTSW, Termination="Through Hole"
J3: library part CMP-02766-001776_ALT, "CONN HEADER VERT 4POS 2.54MM. Versión alterna.", Contact Material=Bronze, Contact Plating=Gold, Gender=Male, Mount="Through Hole", Number of Contacts=4, Number of Rows=1, Packaging=Bulk, Pitch=2.54mm, Radiation Hardening=No, Reach SVHC Compliant=Yes, RoHS Compliant=Yes, Series=HTSW, Termination="Through Hole"
J4: "Micro SD Memory Card Connector, 1.88mm Profile SMT,Push Push, with normally closed switch"
J5: library part CMP-00595-00270342-1, "PPTC021LGBN-RC 2 Position Total Single Row 2.54 mm Pitch Right Angle Female Header", Color=Black, Current Rating=3A, Max Operating Temperature=105°C, Min Operating Temperature=-40°C, Voltage Rating=250V, Connector Type="Header, Socket", Contact Material="Bronze, Nickel, Tin", Contact Plating=Tin, Height=2.4mm, Housing Color=Black, Housing Material=Plastic, Lead Free="Lead Free", Length=5.58mm, Mount="Through Hole", NexarPartId=270342, Number of Contacts=2, Number of Positions=2, Number of Rows=1, Packaging=Bulk, Pitch=2.54mm, RoHS=Compliant, Termination=Solder, Width=8.5mm
JP1 JP2 JP3 JP4 JP5 JP6 JP7 JP8 JP9 JP10 JP11 JP12 JP13 JP14 JP15 JP16 JP17 JP18 JP19 JP20 JP21 JP22 JP23 JP24 JP25 JP26: "Simbolo de jumper genérico"
Q1: library part CMP-02550-000184-1, "MOSFET N-CH 20V 2.6A SOT-23", Continuous Drain Current=2.6A, Drain To Source Breakdown Voltage=20V, Drain To Source Resistance=0.045Ω, Gate To Source Voltage=8V, Manufacturer=Vishay, Max Forward Diode Voltage=1.2V, Max Junction Temp=+150°C, Package=S-03946, Power Dissipation=0.71W, Pulse Drain Current=10A, Temperature="-55°C to +150°C", Temperature Range Low=-55°C, Typ Forward Diode Voltage=0.7V, Automotive=No, Category=Trans, ComponentLink2Description=Datasheet, ComponentLink2URL=http://www.vishay.com/docs/68645/si2302cds.pdf, Depletion Mode=False, Device Class L1="Discrete Semiconductors", Device Class L2=Transistors, Device Class L3=MOSFETs, Digikey Description="MOSFET N-CH 20V 2.6A SOT-23", Drain To Source Voltage=20V, Gate Charge At Vgs="3.5nC @ 4.5V", Height=1.12mm, Lead Free=Yes, Manufacturer Part Number=SI2302CDS-T1-E3, Mouser Description="MOSFET 20V 2.9A 0.86W 57mohm @ 4.5V", Number Of Channels=1, Number Of N Channels=1, Octopart=https://octopart.com/si2302cds-t1-e3-vishay-44452855, Reverse Recovery Charge=2nC, Reverse Recovery Time=8.5ns, RoHS=TRUE, Rthja Max=140°C/W, Standoff Height=0.01mm, Temperature Range High=+150°C, Threshold Vgs Max=0.85V, Threshold Vgs Min=0.4V, Transconductance=13S, Turn Off Delay Time=30ns, Turn On Delay Time=8ns
R1 R2 R3 R4 R5 R6 R7 R8 R9 R10 R12 R13 R14 R15 R16 R17 R18 R19 R20 R21 R22 R23 R24 R25 R26 R27 R28 R29 R30 R31 R32: library part "Generic R"
R11: library part "Generic LDR", Dark Resistance=1MΩ, Light Resistance=10kΩ, Diameter=5mm, Spectral Response Range=400-700nm
S1: "Switch Tactile SPST-NO 5,2mm x 5,2mm"
TP1 TP2 TP3 TP4 TP5 TP6 TP7 TP8 TP9 TP10 TP11 TP12 TP13 TP14 TP15 TP16 TP17 TP18 TP19 TP20 TP21 TP22 TP23 TP24 TP25 TP26 TP27 TP28 TP29 TP30 TP31 TP32 TP33 TP34 TP35 TP36 TP37 TP38: library part Testpoint_SMD, "Testpoint SMD de 1mm de diametro."
U1: "ARM Cortex-M3 32-bit MCU, 64 KB Flash, 20 KB Internal RAM, 37 I/Os, 48-pin LQFP, -40 to 85 degC, Tray", I/Os (High Current)=37, Operating Frequency(F) (Processor speed) (MHz)=72, Supply Voltage(Vcc) min (V)=2, A/D Converter="2x12-bit (10 Channel)", ComponentLink1Description="Manufacturer URL", ComponentLink1URL=http://www.st.com/web/en/home.html, ComponentLink2Description=Datasheet, ComponentLink2URL=http://www.st.com/st-web-ui/static/active/en/resource/technical/document/datasheet/CD00161566.pdf, ComponentLink3Description="Package Specification", ComponentLink3URL=http://www.st.com/st-web-ui/static/active/en/resource/technical/document/datasheet/DM00058181.pdf, Core="ARM Cortex-M3", DatasheetVersion="Rev. 16", FLASH Size (Prog) (kB)=64, Internal RAM Size (kB)=20, Mounting Technology="Surface Mount", PackageDescription="48-Pin Low Profile Quad Flat Package, 7 x 7 mm Body, 0.5 mm Pitch", PackageReference=LQFP48, PackageVersion="Rev. 6, 06/2013", Packing=Tray, PartNumber=STM32F103C8T6
U2 U3: "IC REG LINEAR 3V 300MA SOT23-5"
U4: library part "DS3231S# for battery use", "IC RTC CLK/CALENDAR I2C 16SOIC. Symbol used with battery as the main supply voltage."
U5: library part HM10, "Modulo BLE HM10 con castellated pads."
U6: "ADS1220 4-Channel, 2-kSPS, Low-Power, 24-Bit ADC with Integrated PGA and Reference"
Y1: "Cristal SMD 4-P genérico", Frequency="8 MHz", Manufacturer="Shenzhen SCTF Elec", Manufacturer part=SX5B8.000F1020F30, Package=SMD5032-4P, CL="10 pF", Datasheet=https://jlcpcb.com/api/file/downloadByFileSystemAccessId/8590208237112238080, ESR="100 Ω"

## Free pads (board coordinates)
  round 1 hole 3 unplated mask+0: MH(56.8,23.8) MH(56.8,83.8) MH(116.8,83.8)
  round 1 hole 1.152 unplated mask+0: TH(54.7,27.5) TH(119.7,80.3)

## Via types
v1: diameter 0.6, hole 0.3, L1 - TOP (Sig) to L4 - BOT (Sig), tented top, 106 vias

## Nets (pads, with @x,y where several pads share a name; then routed paths per layer and width w, separated by ;. In a path a pad name is that pad's centre, name@x,y a point inside that pad or via, vN(x,y) a via of type N, cw(c..) or ccw(c..) an arc to the next point about the centre after c; other vN are vias at no path point)
+3V: C2.1 JP1.1 JP2.1 JP7.1 JP10.1 JP15.1 JP26.1 TP2.1 U2.5 | length 121.2
  L1 - TOP (Sig) w0.3: 105.2,66.6 107.3,64.5 107.3,64.2
  L1 - TOP (Sig) w0.4: 104.9,66.9 105.2,66.6 ; 107.3,63.9 107.3,64.2
  L1 - TOP (Sig) w0.5: JP1.1@76.6,55.2 78,55.2 78.7,55.9 78.7,63.7 79.5,64.5 ; JP10.1@76.8,64.5 79.5,64.5 ; v1(96.2,39.1) 96.219,39.081 96.219,36.786 JP7.1@96.25,36.755 ; C2.1@102.6,71.5 102.6,68.575 101.425,67.4 ; 104.9,66.9 104.4,67.4 101.425,67.4 ; JP26.1@107.3,62.55 107.3,63.9 ; 79.5,64.5 91.2,64.5 94.1,67.4 v1(96.583,67.4) TP2.1@99.067,67.4 101.425,67.4
  L4 - BOT (Sig) w0.5: JP2.1@79,27 79.1,27.1 81.6,27.1 83.6,29.1 83.6,31.4 88.3,36.1 88.3,40.1 89.3,41.1 94.2,41.1 ; v1(83.1,64.5) 84.2,63.4 84.2,51.1 94.2,41.1 ; JP15.1@87.5,73.2 87.7,73 87.7,72.2 90.9,69 96,69 96.564,68.436 96.564,67.419 v1(96.583,67.4) ; v1(96.2,39.1) 94.2,41.1
+3V_ADS_A: C20.1 FB1.2 TP37.1 U6.12 | length 18.2
  L1 - TOP (Sig) w0.3: U6.12@106.15,54.275 106.175,54.3 107.1,54.3 ; 109.3,55.7 111.3,55.7 111.6,55.4 111.8,55.4
  L1 - TOP (Sig) w0.4: 107.1,54.3 107.4,54.3 ; 108.9,55.2 108.9,55.466 109.134,55.7 109.3,55.7 ; 111.8,55.4 112.1,55.4
  L1 - TOP (Sig) w0.5: 107.4,54.3 108.523,54.3 C20.1@108.525,54.298 ; C20.1@108.9,54.65 108.9,55.2 ; 112.1,55.4 113.124,55.4 FB1.2@113.4,55.124 113.424,55.1 115.3,55.1 116.5,56.3 TP37.1@116.5,62.85
+3V_ADS_D: C19.1 JP26.2 TP35.1 U6.13 | length 12.6
  L1 - TOP (Sig) w0.3: U6.13@106.15,54.925 107.225,54.925 107.6,55.3 107.6,55.5
  L1 - TOP (Sig) w0.4: 107.6,55.5 107.6,55.766 107.834,56
  L1 - TOP (Sig) w0.5: JP26.2@107.3,61.15 107.35,61.1 109.5,61.1 ; 107.834,56 108.1,56.266 108.1,56.3 108.175,56.3 108.825,56.95 C19.1@108.9,56.95 108.9,60.5 109.5,61.1 ; TP35.1@110.2,62.95 110.2,61.8 109.5,61.1
+3V_BLE: C16.1 JP10.2 R9.1 R10.1 TP18.1 U5.12 | length 42
  L1 - TOP (Sig) w0.508: R9.1@66.2,64.5 66.2,62.898 66.498,62.6 70,62.6 ; U5.12@69.7,66.7 C16.1@69.7,64.5 69.7,62.9 70,62.6 ; R10.1@71.8,84.8 73.6,84.8 74.2,84.2 74.2,82 76.2,80 76.2,71 77.6,69.6 TP18.1@77.6,68.2 77.6,66.9 77.2,66.5 76.3,66.5 75.4,65.6 JP10.2@75.4,64.5 75.4,63.1 74.9,62.6 70,62.6
+3V_MCU: C6.1 C7.1 C8.1 C9.1 C10.1 C11.1 C12.1 J2.1 JP1.2 R6.1 R7.1 TP8.1 U1.1 U1.9 U1.24 U1.36 U1.48 | length 185.7
  L1 - TOP (Sig) w0.254: 64.1,45.7 64.2,45.7 64.4,45.9 64.4,46.4 64.673,46.673 65.623,46.673 U1.9@65.625,46.675 ; U1.48@66.898,52.5 66.9,52.498 U1.48@66.9,51.95 ; U1.24@72.4,43.9 72.4,43.302 U1.24@72.402,43.3 ; U1.36@73.675,50.675 74.098,50.675 U1.36@74.1,50.677
  L1 - TOP (Sig) w0.3: 64,45.7 64.1,45.7 ; 84.4,23.4 85.7,22.1 85.7,21.2 87.3,19.6 105.9,19.6 v1(107.2,20.9)
  L1 - TOP (Sig) w0.4: C6.1@63.325,45.425 63.6,45.7 64,45.7 ; 84.1,23.7 84.4,23.4
  L1 - TOP (Sig) w0.5: C12.1@61.3,45.425 C6.1@63.325,45.425 63.312,45.413 63.312,44.013 v1(63.3,44) ; C7.1@66.225,54.375 C7.1@66.3,54.3 ; v1(68.2,38) R6.1@68.2,39.225 ; C11.1@73.2,41.925 C11.1@73.4,41.725 ; C10.1@75.6,51.7 C10.1@75.8,51.9 ; v1(82,33.2) 83.4,31.8 83.4,24.4 84.1,23.7
  L4 - BOT (Sig) w0.3: 66.6,44 72.3,44 ; 68.1,49.9 69.4,48.6 71.8,48.6 ; J2.1@98.28,86.4 98.2,86.32 98.2,82.8 100.2,80.8 108.1,80.8 110.1,78.8 110.1,75.4 118.2,67.3 118.2,34.1 115.1,31 111,31 107.2,27.2 v1(107.2,20.9)
  L4 - BOT (Sig) w0.4: 65.7,44 66.6,44 ; 67.2,50.8 68.1,49.9 ; 71.8,48.6 72.3,48.6 ; 72.3,44 72.7,44
  L4 - BOT (Sig) w0.5: v1(63.3,44) 64.344,44 ; 65.7,44 64.344,44 ; 67.2,50.8 v1(65.4,52.6) 65.4,45.056 64.344,44 ; v1(68.2,38) v1(73.7,38) ; 72.3,48.6 72.9,48.6 73.7,49.4 v1(73.7,52.3) ; 72.7,44 73.273,44 73.673,43.6 v1(73.7,43.6) 76.6,40.7 76.6,35.393 77.687,34.306 80.894,34.306 v1(82,33.2)
+3V_RTC: C15.1 JP7.2 R8.1 TP15.1 U4.14 | length 32.3
  L1 - TOP (Sig) w0.5: R8.1@93.5,21.155 101.555,21.155 101.8,21.4 101.8,22.005 TP15.1@101.85,22.055 101.85,28.95 ; JP7.2@96.25,35.355 96.305,35.3 100.7,35.3 101.85,34.15 101.85,28.95 ; U4.14@97.2,29.655 97.238,29.693 99.788,29.693 99.795,29.7 101.1,29.7 101.85,28.95
+3V_SD: C17.1 J4.4 JP15.2 R20.1 R21.1 R22.1 R23.1 R24.1 R25.1 TP33.1 | length 89
  L1 - TOP (Sig) w0.508: v1(78.1,76) v1(86.7,76)
  L4 - BOT (Sig) w0.3: 57.3,79.4 59.8,81.9 59.8,84.7 58.8,85.7 58.8,87.2 59.5,87.9 62.6,87.9
  L4 - BOT (Sig) w0.4: 57.3,78.7 57.3,79.4 ; 62.6,87.9 63.2,87.9
  L4 - BOT (Sig) w0.5: 57.3,78.7 58.1,77.9 59.5,77.9 R24.1@59.6,77.8 ; 59.6,76 59.6,70.8 61.3,69.1 R25.1@65.2,69.1 ; JP15.2@87.5,74.65 87.3,74.85 87.3,75.4 v1(86.7,76) 87.6,76.9 87.6,83.6
  L4 - BOT (Sig) w0.508: TP33.1@55.2,74.9 58.5,74.9 59.6,76 R24.1@59.6,77.8 ; 63.2,87.9 66,87.9 67.3,86.6 ; J4.4@66.7,83.8 66.7,86 67.3,86.6 ; C17.1@76.479,85.204 76.404,85.204 75.8,84.6 73,84.6 71,86.6 67.3,86.6 ; C17.1@76.7,85.5 85.7,85.5 87.6,83.6 ; v1(78.1,76) R22.1@78.1,77.4 ; v1(81.2,76) R21.1@81.2,77.4 ; v1(83.4,76) R20.1@83.4,77.4 ; v1(85.5,76) R23.1@85.5,77.4
+3V_SHT: J3.1 JP2.2 TP10.1 | length 10.1
  L4 - BOT (Sig) w0.6: J3.1@72.1,29.31 72.21,29.2 74.2,29.2 ; TP10.1@77.5,30 75,30 74.2,29.2 ; JP2.2@77.6,27 76.4,27 74.2,29.2
+3VA: C4.1 R26.1 TP6.1 U3.5 | length 19.4
  L1 - TOP (Sig) w0.3: 115,62.025 115,64.175
  L1 - TOP (Sig) w0.4: 114.525,60.15 114.725,60.15 115,60.425 115,62.025 ; 115,64.175 115,64.65
  L1 - TOP (Sig) w0.5: C4.1@109.8,71.5 109.875,71.425 113.65,71.425 114.175,70.9 114.2,70.9 ; R26.1@113.4,60.2 113.45,60.15 114.525,60.15 ; 115,64.65 115,70.1 114.2,70.9 ; TP6.1@116.4,70.9 114.2,70.9
ADC_DRDY: JP23.2 R19.2 TP31.1 | length 35
  L1 - TOP (Sig) w0.152: R19.2@84.7,52.033 84.824,51.91 TP31.1@89.6,51.91 92.511,51.91 92.6,51.999 ; 92.6,52 93,52.4 93,62.5 96.5,66 103.7,66 105.6,64.1 JP23.2@105.6,62.55
ADC_DRDY_MCU: R19.1 U1.30 | length 12.8
  L1 - TOP (Sig) w0.152: U1.30@73.675,47.675 76.825,47.675 77.3,47.2 79.3,47.2 80.1,48 80.1,49.6 82.533,52.033 R19.1@83.3,52.033
ADS_CS: JP25.2 U6.2 | length 6.4
  L1 - TOP (Sig) w0.152: JP25.2@98.75,61.2 98.75,56.45 98.975,56.225 U6.2@100.35,56.225
ADS_DIN: JP22.2 U6.16 | length 5.5
  L1 - TOP (Sig) w0.152: JP22.2@103.9,61.15 103.9,58.6 105.625,56.875 U6.16@106.15,56.875
ADS_DOUT: JP21.2 U6.15 | length 7.7
  L1 - TOP (Sig) w0.152: JP21.2@102.2,61.15 102.2,58.2 104.175,56.225 U6.15@106.15,56.225